# Altium PCB PCB1.PcbDoc (part 2 of 2)
Units mm, origin at the board's own origin, x right, y up, seen from the top; angles counter-clockwise.
Board outline 71.07 x 44.83 mm, 4 copper layers (Top Layer, Layer 1, Layer 2, Bottom Layer), stack 0.584 mm thick; 134 components, 68 nets, 384 pads, 224 vias.
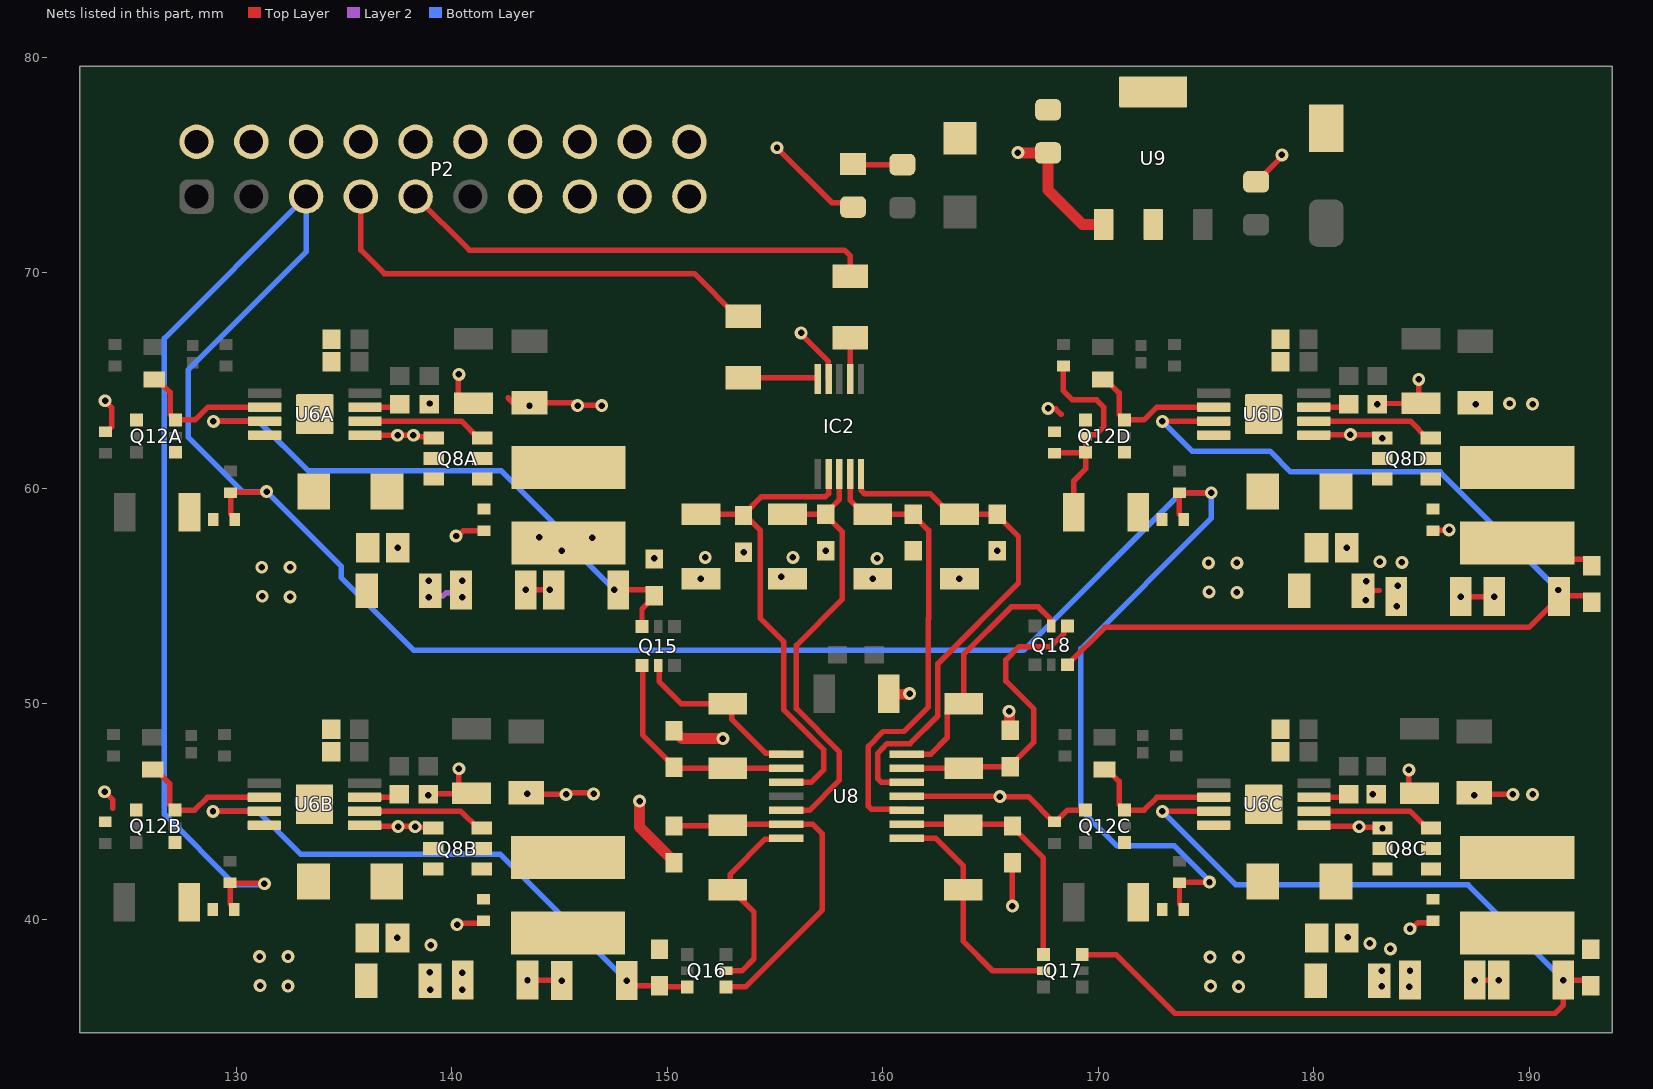
[diagram p4: the nets of this part, all layers, seen from the top]

## Via types
v1: diameter 0.6, hole 0.3, Top Layer to Bottom Layer, 128 vias
v2: diameter 0.6, hole 0.3, Top Layer to Bottom Layer, tented both sides, 94 vias
v3: diameter 0.6/0.6/0.6 (per signal layer), hole 0.3, Top Layer to Bottom Layer, 2 vias

## Nets (pads, with @x,y where several pads share a name; then routed paths per layer and width w, separated by ;. In a path a pad name is that pad's centre, name@x,y a point inside that pad or via, vN(x,y) a via of type N, cw(c..) or ccw(c..) an arc to the next point about the centre after c; other vN are vias at no path point) (continued)
B_SS_BJTD: C66D.1 Q12D.5 Q12D.6 R48D.2 R54D.2 | length 10.5
  Top Layer w0.254: R54D.2@167.97,61.623 167.993,61.647 169.383,61.647 Q12D.6@169.407,61.67 ; R48D.2@168.376,65.673 168.376,64.516 168.794,64.099 169.915,64.099 170.248,63.766 170.248,62.852 169.889,62.493 169.48,62.493 Q12D.5@169.407,62.42 Q12D.6@169.407,61.67 ; C66D.1@168.857,58.889 168.857,60.344 169.407,60.893 Q12D.6@169.407,61.67
En: P2.5 R49A.1 R49B.1 R49C.1 R49D.1 R50A.2 R50B.2 R50C.2 R50D.2 | length 141.8
  Top Layer w0.254: R50B.2@129.92,40.463 129.92,40.513 129.725,40.709 R49B.1@129.725,41.699 129.746,41.677 131.297,41.677 v1(131.318,41.656) ; R50A.2@129.939,58.559 129.939,58.609 129.743,58.804 R49A.1@129.743,59.794 129.767,59.818 131.396,59.818 v1(131.42,59.842) ; R50D.2@173.956,58.559 173.956,58.609 173.761,58.804 R49D.1@173.761,59.794 R49D.1@173.761,59.794 175.233,59.793 v1(175.235,59.792) ; R50C.2@173.958,40.463 173.958,40.513 173.763,40.709 R49C.1@173.763,41.699 173.792,41.728 v1(175.154,41.728)
  Bottom Layer w0.254: v1(131.318,41.656) 131.267,41.605 129.946,41.605 126.67,44.882 126.67,66.954 P2.5@133.248,73.533 133.248,70.968 127.787,65.507 127.787,62.357 130.302,59.842 v1(131.42,59.842) 134.869,56.393 134.869,55.86 138.252,52.476 166.522,52.476 173.838,59.792 v1(175.235,59.792) 175.235,58.598 169.189,52.553 169.189,45.081 170.856,43.414 173.527,43.414 175.154,41.787 v1(175.154,41.728)
FB_in1: C65A.2 Q15.6 R37A.1 U6A.3 | length 28.3
  Top Layer w0.254: v1(128.949,63.105) 129.178,63.105 129.186,63.112 U6A.3@131.33,63.112 ; C65A.2@147.55,55.537 v1(147.55,55.283) C65A.2@147.728,55.283 149.137,55.283 R37A.1@149.403,55.017 149.403,54.967 148.831,54.394 Q15.6@148.831,53.58
  Bottom Layer w0.254: v1(128.949,63.105) 131.053,63.105 133.35,60.808 142.308,60.808 146.27,56.846 146.27,56.563 v1(147.55,55.283)
FB_in2: C65B.2 Q16.6 R37B.1 U6B.3 | length 27.8
  Top Layer w0.254: v1(128.93,45.009) 129.159,45.009 129.167,45.017 U6B.3@131.311,45.017 ; v1(148.116,37.161) 148.356,36.921 R37B.1@149.638,36.921 149.692,36.867 Q16.6@150.93,36.867
  Bottom Layer w0.254: v1(128.93,45.009) 131.013,45.009 132.994,43.028 142.249,43.028 v1(148.116,37.161)
FB_in3: C65C.2 Q17.6 R37C.1 U6C.3 | length 50.4
  Top Layer w0.254: Q17.6@169.251,38.367 170.827,38.367 173.558,35.636 191.184,35.636 191.57,36.022 191.57,36.921 v1(191.57,37.187) 192.572,37.187 R37C.1@192.838,36.921 ; v1(172.969,45.009) 173.197,45.009 173.205,45.017 U6C.3@175.349,45.017
  Bottom Layer w0.254: v1(172.969,45.009) 176.372,41.605 187.151,41.605 v1(191.57,37.187)
FB_in4: C65D.2 Q18.6 R37D.1 U6D.3 | length 49.6
  Top Layer w0.254: Q18.6@168.568,51.815 170.296,53.543 189.974,53.543 191.448,55.017 192.836,55.017 R37D.1@192.849,55.004 ; v1(172.967,63.105) 173.195,63.105 173.203,63.112 U6D.3@175.348,63.112
  Bottom Layer w0.254: v1(172.967,63.105) 174.349,61.722 177.952,61.722 178.918,60.757 185.856,60.757 v1(191.331,55.281)
GND: C57A.1 C57B.1 C57C.1 C57D.1 C58A.1 C58B.1 C58C.1 C58D.1 C59A.1 C59B.1 C59C.1 C59D.1 C60A.2 C60B.2 C60C.2 C60D.2 C61A.1 C61B.1 C61C.1 C61D.1 C62A.2 C62B.2 C62C.2 C62D.2 C66A.2 C66B.2 C66C.2 C66D.2 C67.2 C69.2 C71.2 C73.2 C75.2 C76.2 C77.2 D5A.1 D5B.1 D5C.1 D5D.1 IC2.4 LED_2.2 P2.2 P2.4 P2.6 P2.8 P2.10 P2.12 P2.14 P2.16 P2.18 P2.20 Q12A.1 Q12A.4 Q12B.1 Q12B.4 Q12C.1 Q12C.4 Q12D.1 Q12D.4 R50A.1 R50B.1 R50C.1 R50D.1 R54A.1 R54B.1 R54C.1 R54D.1 R56.2 R57.1 R58.2 R59.1 R60.2 R64.1 R65.2 R66.1 U6A.4 U6A.9 U6B.4 U6B.9 U6C.4 U6C.9 U6D.4 U6D.9 U8.11 U9.1 | length 45.6
  Top Layer w0.254: v1(123.901,45.923) 124.282,45.542 124.282,45.161 ; v1(123.927,64.059) 123.927,64.042 124.231,63.737 124.231,62.852 124.003,62.623 R54A.1@123.952,62.623 ; v1(138.913,45.771) 138.963,45.822 140.266,45.822 140.335,45.891 v1(140.335,46.99) ; C58A.1@138.964,63.904 138.964,63.907 v1(138.989,63.932) ; C60A.2@140.31,63.943 140.31,65.253 v1(140.335,65.278) ; v1(155.092,75.794) 157.642,73.244 158.42,73.244 LED_2.2@158.623,73.041 ; v1(156.21,67.208) 156.21,67.155 157.465,65.9 157.465,65.088 IC2.4@157.488,65.065 ; U8.11@161.112,45.71 165.415,45.71 v1(165.43,45.695) 166.754,45.695 167.922,44.527 R54C.1@167.972,44.527 168.022,44.527 168.568,45.074 Q12C.4@169.408,45.074 ; v1(166.014,40.615) R64.1@166.014,42.635 ; v1(167.665,63.703) 167.691,63.678 168.021,63.678 168.275,63.424 ; C76.2@177.317,74.219 177.351,74.219 178.511,75.379 v1(178.511,75.463) ; v1(182.931,63.906) C58D.1@182.93,63.904 182.959,63.932 184.317,63.932 184.327,63.943 184.488,63.943 184.861,64.316 v1(184.861,65.049) ; C60C.2@184.329,45.847 184.404,45.922 v1(184.404,46.939)
  Top Layer w0.508: v1(148.717,45.491) 148.717,44.285 150.317,42.685 R59.1@150.317,42.635 ; R57.1@150.317,48.754 150.317,48.704 150.463,48.558 150.513,48.558 150.685,48.387 v1(152.578,48.387) ; C67.2@160.275,50.47 160.301,50.444 161.087,50.444 161.112,50.47 v1(161.239,50.47) ; v1(165.862,49.657) 165.88,49.639 165.88,48.813 R66.1@165.913,48.78 ; v1(166.268,75.565) 166.273,75.56 167.661,75.56 C77.2@167.665,75.556 167.665,75.336 167.665,73.838 169.267,72.236 U9.1@170.242,72.236
  other v1: 176.505,36.881 132.41,36.906 175.209,36.906 131.115,36.932 175.184,38.252 176.505,38.252 131.089,38.278 132.41,38.278 182.729,45.808 132.512,54.966 131.216,54.991 176.428,55.169 175.133,55.194 151.562,55.802 159.537,55.802 163.551,55.802 155.296,55.905 175.108,56.54 176.428,56.54 159.741,56.744 151.765,56.794 155.829,56.794 153.543,57.037 157.353,57.1 165.303,57.1
  other v3: 131.191,56.337 132.512,56.337
IN-1: C68.2 Q15.1 R57.2 U8.2 | length 10.6
  Top Layer w0.254: Q15.1@148.831,51.78 148.863,51.747 148.863,48.559 150.317,47.104 R57.2@150.317,47.054 150.362,47.01 U8.2@155.512,47.01
IN-2: C70.2 Q16.1 R59.2 U8.6 | length 16.6
  Top Layer w0.254: R59.2@150.317,44.335 150.331,44.348 C70.2@152.806,44.348 ; Q16.1@152.73,36.867 153.631,36.867 157.201,40.437 157.201,43.971 156.762,44.41 U8.6@155.512,44.41 152.841,44.41 C70.2@152.806,44.375
IN-3: C72.2 Q17.1 R64.2 U8.9 | length 11.5
  Top Layer w0.254: U8.9@161.112,44.41 165.94,44.41 R64.2@166.014,44.335 166.014,44.285 167.451,42.848 Q17.1@167.451,38.367
IN-4: C74.2 Q18.1 R66.2 U8.13 | length 14.4
  Top Layer w0.254: U8.13@161.112,47.01 C74.2@163.749,47.01 ; C74.2@163.754,47.08 R66.2@165.913,47.08 165.913,47.13 167.005,48.222 167.005,49.759 165.71,51.054 165.71,52.045 166.319,52.654 167.788,52.654 168.395,53.261 168.395,53.442 Q18.1@168.568,53.615
ISENA: Q8A.4 R31A.2 U6A.5 | length 7.9
  Top Layer w0.254: U6A.5@135.98,62.462 135.982,62.46 137.488,62.46 v1(137.49,62.459) v1(138.227,62.459) 138.292,62.394 139.094,62.394 Q8A.4@139.159,62.329 ; 142.621,64.195 142.849,63.967 R31A.2@143.612,63.967 ; v1(143.612,63.83) R31A.2@143.612,63.967 ; v1@146.964,63.856 145.847,63.856 145.736,63.967 R31A.2@143.612,63.967
  other v1: 145.847,63.83 146.964,63.83
ISENB: Q8B.4 R31B.2 U6B.5 | length 6.5
  Top Layer w0.254: U6B.5@135.961,44.367 135.996,44.332 138.268,44.332 138.335,44.265 139.108,44.265 Q8B.4@139.141,44.233 Q8B.4@139.16,44.252 ; R31B.2@143.466,45.871 143.541,45.796 v1(145.313,45.796) 145.39,45.872 146.558,45.872 v1@146.583,45.898 ; v1(143.51,45.822) R31B.2@143.51,45.827
  other v1: 137.514,44.307 138.303,44.298 146.583,45.822
ISENC: Q8C.4 R31C.2 U6C.5 | length 5.1
  Top Layer w0.254: U6C.5@179.999,44.367 180.034,44.332 182.058,44.332 182.125,44.265 183.146,44.265 v1(183.179,44.233) ; v1(187.427,45.771) 187.428,45.772 R31C.2@187.428,45.871 ; R31C.2@187.452,45.847 187.503,45.796 v1(189.23,45.796)
  other v1: 182.093,44.298 190.144,45.796
ISEND: Q8D.4 R31D.2 U6D.5 | length 3.3
  Top Layer w0.254: U6D.5@179.998,62.462 180.008,62.473 181.675,62.473 v1(181.686,62.484) 183.022,62.484 v1(183.177,62.329)
  other v1: 187.503,63.906 190.144,63.906 189.078,63.932
NetIC2_2: IC2.2 R68.1 | length 1.6
  Top Layer w0.254: IC2.2@158.488,65.065 158.488,66.667 R68.1@158.496,66.675
NetIC2_5: IC2.5 R69.1 | length 3.5
  Top Layer w0.254: R69.1@153.518,65.123 156.965,65.123 156.988,65.1 IC2.5@156.988,65.065
NetLED_2_1: LED_2.1 R67.2 | length 2.3
  Top Layer w0.254: LED_2.1@158.623,75.041 158.648,75.016 R67.2@160.909,75.016
OpOut1: C68.1 Q15.2 U8.1 | length 8.4
  Top Layer w0.254: Q15.2@149.581,51.78 149.619,51.741 149.619,51.041 150.647,50.013 152.805,50.013 C68.1@152.806,50.014 153.004,49.817 153.004,49.282 154.578,47.708 155.464,47.708 U8.1@155.512,47.66
OpOut2: C70.1 Q16.2 U8.7 | length 9.3
  Top Layer w0.254: Q16.2@152.73,37.617 153.467,37.617 154.026,38.176 154.026,40.342 152.992,41.375 C70.1@152.928,41.375 ; C70.1@152.806,41.375 152.928,41.496 152.928,42.107 154.543,43.723 155.475,43.723 U8.7@155.512,43.76
OpOut3: C72.1 Q17.2 U8.8 | length 10.9
  Top Layer w0.254: U8.8@161.112,43.76 162.463,43.76 163.728,42.494 C72.1@163.728,41.375 163.728,38.989 165.1,37.617 Q17.2@167.451,37.617
OpOut4: C74.1 Q18.2 U8.14 | length 12.1
  Top Layer w0.254: U8.14@161.112,47.66 162.214,47.66 162.981,48.427 162.981,49.641 163.354,50.014 C74.1@163.754,50.014 163.754,52.299 165.958,54.503 167.21,54.503 167.745,53.969 167.745,53.688 Q18.2@167.818,53.615
PGateA: Q8A.3 U6A.6 | length 5.8
  Top Layer w0.254: U6A.6@135.98,63.112 140.451,63.112 141.234,62.329 Q8A.3@141.409,62.329
PGateB: Q8B.3 U6B.6 | length 5.8
  Top Layer w0.254: U6B.6@135.961,45.017 140.432,45.017 141.216,44.233 Q8B.3@141.391,44.233
PGateC: Q8C.3 U6C.6 | length 5.8
  Top Layer w0.254: U6C.6@179.999,45.017 184.47,45.017 185.254,44.233 Q8C.3@185.429,44.233
PGateD: Q8D.3 U6D.6 | length 5.8
  Top Layer w0.254: U6D.6@179.998,63.112 184.468,63.112 185.252,62.329 Q8D.3@185.427,62.329
pre_+3.3: C77.1 D7.1 FU2.1 U9.2 U9.4
RTA: Q12A.3 R44A.1 U6A.2 | length 6.7
  Top Layer w0.254: R44A.1@126.213,65.048 126.338,65.048 126.941,64.445 126.941,63.418 Q12A.3@127.189,63.17 128.098,63.17 128.69,63.762 U6A.2@131.33,63.762
RTB: Q12B.3 R44B.1 U6B.2 | length 6.8
  Top Layer w0.254: R44B.1@126.143,46.952 126.268,46.952 126.663,46.557 126.918,46.303 126.918,46.12 126.922,46.116 126.922,45.322 Q12B.3@127.17,45.074 128.079,45.074 128.671,45.667 U6B.2@131.311,45.667
RTC: Q12C.3 R44C.1 U6C.2 | length 6.7
  Top Layer w0.254: R44C.1@170.283,46.952 170.408,46.952 170.96,46.4 170.96,45.322 Q12C.3@171.208,45.074 172.117,45.074 172.71,45.667 U6C.2@175.349,45.667
RTD: Q12D.3 R44D.1 U6D.2 | length 6.8
  Top Layer w0.254: R44D.1@170.205,65.048 170.33,65.048 170.959,64.42 170.959,63.418 Q12D.3@171.207,63.17 172.115,63.17 172.708,63.762 U6D.2@175.348,63.762
SCL: P2.9 R68.2 | length 22.2
  Top Layer w0.254: P2.9@138.328,73.533 140.818,71.044 158.217,71.044 158.496,70.764 R68.2@158.496,69.83
SDA: P2.7 R69.2 | length 21.5
  Top Layer w0.254: P2.7@135.788,73.533 135.788,71.044 136.881,69.952 151.264,69.952 153.243,67.973 R69.2@153.518,67.973
SMos3A: D5A.2 L5A.1 Q8A.1 Q8A.2 Q8A.5 Q8A.6 R35A.2
SMos3B: D5B.2 L5B.1 Q8B.1 Q8B.2 Q8B.5 Q8B.6 R35B.2
SMos3C: D5C.2 L5C.1 Q8C.1 Q8C.2 Q8C.5 Q8C.6 R35C.2
SMos3D: D5D.2 L5D.1 Q8D.1 Q8D.2 Q8D.5 Q8D.6 R35D.2
StarN3A: C56A.2 C65A.1 R35A.1 | length 2.5
  Top Layer w0.254: v1(140.208,57.785) 140.302,57.785 140.549,58.033 R35A.1@141.497,58.033 ; v1(143.435,55.283) v1(144.55,55.283)
StarN3B: C56B.2 C65B.1 R35B.1 | length 2.9
  Top Layer w0.254: v1(140.259,39.759) 140.325,39.825 141.366,39.825 R35B.1@141.478,39.937 ; v1(143.518,37.187) 145.09,37.187 v1(145.116,37.161)
StarN3C: C56C.2 C65C.1 R35C.1 | length 2.3
  Top Layer w0.254: v1(184.455,39.568) 184.548,39.568 184.835,39.855 185.435,39.855 R35C.1@185.516,39.937 ; v1(187.455,37.187) v1(188.57,37.187)
StarN3D: C56D.2 C65D.1 R35D.1 | length 2.3
  Top Layer w0.254: R35D.1@185.514,58.033 185.532,58.05 186.254,58.05 v1(186.271,58.067) ; v1(186.818,54.978) v1(188.365,54.978)
Vadj_1: C69.1 IC2.7 R56.1 U8.3 | length 22.6
  Top Layer w0.254: C69.1@151.562,58.802 153.617,58.802 R56.1@153.619,58.8 ; U8.3@155.512,46.36 156.672,46.36 157.251,46.939 157.251,47.879 155.397,49.733 155.397,52.883 154.305,53.975 154.305,58.064 154.026,58.344 153.619,58.75 R56.1@153.619,58.8 ; IC2.7@157.488,60.665 157.488,59.756 157.339,59.607 154.376,59.607 153.619,58.85 R56.1@153.619,58.8
Vadj_2: C71.1 IC2.8 R58.1 U8.5 | length 21.3
  Top Layer w0.254: U8.5@155.512,45.06 156.591,45.06 157.988,46.457 157.988,47.774 155.988,49.774 155.988,52.716 158.115,54.843 158.115,57.988 157.353,58.75 R58.1@157.353,58.8 ; C71.1@155.575,58.802 157.351,58.802 R58.1@157.353,58.8 ; IC2.8@157.988,60.665 157.988,59.485 157.353,58.85 R58.1@157.353,58.8
Vadj_3: C73.1 IC2.9 R60.1 U8.10 | length 21.8
  Top Layer w0.254: IC2.9@158.488,60.665 158.488,59.452 159.137,58.802 C73.1@159.537,58.802 161.415,58.802 161.415,58.752 162.122,58.045 162.122,53.949 162.117,53.945 162.117,49.849 160.985,48.717 160.02,48.717 159.334,48.031 159.334,45.256 159.483,45.108 161.064,45.108 U8.10@161.112,45.06
Vadj_4: C75.1 IC2.10 R65.1 U8.12 | length 25
  Top Layer w0.254: IC2.10@158.988,60.665 159.011,60.642 159.011,59.89 159.16,59.741 162.212,59.741 163.151,58.802 C75.1@163.551,58.802 165.301,58.802 165.301,58.752 166.294,57.759 166.294,55.601 162.549,51.856 162.549,49.443 161.265,48.158 160.205,48.158 159.976,47.929 159.766,47.719 159.766,46.525 159.931,46.36 U8.12@161.112,46.36
VCC3A: C55A.1 U6A.7 | length 1.7
  Top Layer w0.254: U6A.7@135.98,63.762 137.451,63.762 C55A.1@137.592,63.904
VCC3B: C55B.1 U6B.7 | length 1.7
  Top Layer w0.254: U6B.7@135.961,45.667 137.432,45.667 C55B.1@137.573,45.808
VCC3C: C55C.1 U6C.7 | length 1.7
  Top Layer w0.254: U6C.7@179.999,45.667 181.47,45.667 C55C.1@181.611,45.808
VCC3D: C55D.1 U6D.7 | length 1.7
  Top Layer w0.254: U6D.7@179.998,63.762 181.468,63.762 C55D.1@181.61,63.904
Vout1: C56A.1 C61A.2 C62A.1 L5A.2 P2.13 R37A.2 | length 3.5
  Top Layer w0.254: v1(138.938,54.94) 139.016,55.018 C62A.1@139.016,55.257 ; v1(144.069,57.734) 145.151,57.734 L5A.2@145.415,57.47
  Layer 2 w0.254: v1(138.938,54.94) 139.004,55.006 139.609,55.006 139.746,55.143 140.191,55.143 140.394,54.94 v1(140.487,54.94)
  other v1: 138.938,55.702 140.487,55.702 149.403,56.744 145.11,57.099 137.505,57.238 146.533,57.709
Vout2: C56B.1 C61B.2 C62B.1 L5B.2 P2.15 R37B.2 | length 0.4
  Top Layer w0.254: C62B.1@138.997,37.161 138.997,36.745 v1(139.014,36.728)
  other v1: 140.487,36.728 140.487,37.516 138.989,37.541 139.04,38.811 137.486,39.143
Vout3: C56C.1 C61C.2 C62C.1 L5C.2 P2.19 R37C.2 | length 0.3
  Top Layer w0.254: C62C.1@183.036,37.161 183.036,37.005 v1(183.134,36.905)
  other v1: 184.429,36.881 183.134,37.617 184.455,37.617 183.54,38.633 182.596,38.886 181.559,39.167
Vout4: C56D.1 C61D.2 C62D.1 L5D.2 P2.17 R37D.2 | length 5.1
  Top Layer w0.254: v1(182.397,54.813) 182.272,54.939 C62D.1@182.272,55.257 182.39,55.139 182.67,55.139 182.788,55.257 183.034,55.257 ; L5D.2@189.433,57.47 190.186,56.717 R37D.2@192.836,56.717
  other v1: 183.845,54.534 183.896,55.474 182.423,55.677 184.074,56.566 183.058,56.591 181.522,57.238
pads on no net: P2.11 Q15.3 Q15.4 Q15.5 Q16.3 Q16.4 Q16.5 Q17.3 Q17.4 Q17.5 Q18.3 Q18.4 Q18.5

## Polygon pours and split planes (outlines as drawn)
GND on Layer 2 "GND_L03_P005" (solid, remove dead copper, pour order 5): 192.938,78.791 193.243,78.486 193.243,35.839 cw(c192.811,35.839) 192.811,35.408 123.571,35.408 cw(c123.622,35.458) 123.571,35.509 123.571,35.611 123.571,78.816
+42 on Layer 2 "+42_L03_P004" (solid, remove dead copper, pour order 4): 124.739,37.44 127.127,35.052 153.619,35.052 166.853,48.285 187.808,48.285 188.062,48.539 188.062,51.587 187.427,52.222 173.177,52.222 172.136,53.264 172.136,65.049 173.126,66.04 184.683,66.04 184.912,66.269 184.912,68.478 183.871,69.52 164.998,69.52 162.255,66.777 162.255,49.352 151.892,38.989 127.813,38.989 127.127,39.675 127.127,47.136 cw(c129.269,45.991) 128.021,48.075 128.117,48.133 147.117,48.133 147.599,48.616 147.599,50.902 146.558,51.943 127.838,51.943 cw(c127.838,52.629) 127.152,52.629 127.152,65.634 127.686,66.167 140.995,66.167 141.605,66.777 141.605,68.732 141.097,69.24 133.071,69.24 131.597,70.714 131.597,74.219 131.318,74.498 130.099,74.498 129.87,74.27 129.87,70.993 128.245,69.367 125.12,69.367 124.358,68.605 124.358,66.827 124.739,66.446
Vout1 on Layer 2 "VOUT1_L03_P003" (solid, remove dead copper, pour order 3): 136.881,55.626 ccw(c138.176,55.626) 138.176,54.331 140.36,54.331 ccw(c140.36,54.991) 141.021,54.991 141.021,56.032 cw(c141.478,56.032) 141.478,56.49 149.022,56.49 ccw(c149.022,56.693) 149.225,56.693 149.225,63.5 144.348,68.377 144.348,73.99 143.739,74.6 143.002,74.6 142.443,74.041 142.443,67.843 147.472,62.814 147.472,59.588 cw(c147.206,59.55) 147.168,59.284 138.405,59.284 ccw(c138.405,57.76) 136.881,57.76
Vout2 on Layer 2 "VOUT2_L03_P002" (solid, remove dead copper, pour order 2): 138.43,36.246 140.36,36.246 140.919,36.805 140.919,38.024 141.224,38.329 149.809,38.329 151.359,39.878 151.359,64.516 146.99,68.885 146.99,74.016 146.406,74.6 145.517,74.6 144.907,73.99 144.907,68.478 149.758,63.627 149.758,41.326 149.428,40.996 138.024,40.996 136.881,39.853 136.881,37.795
Vout4 on Layer 2 "VOUT4_L03_P001" (solid, remove dead copper, pour order 1): 180.188,54.737 181.229,53.696 188.189,53.696 189.611,55.118 189.611,66.98 185.039,71.552 149.758,71.552 149.555,71.755 149.555,74.168 149.123,74.6 147.93,74.6 147.422,74.092 147.422,71.653 149.377,69.698 184.328,69.698 188.036,65.989 188.036,58.064 187.223,57.252 183.566,57.252 182.778,58.039 181.051,58.039 180.188,57.175
Vout3 on Layer 2 "VOUT3_L03_P000" (solid, remove dead copper, pour order 0): 181,37.795 181,39.853 181.966,40.818 189.332,40.818 190.525,42.012 190.525,67.615 185.674,72.466 150.495,72.466 149.962,73 149.962,73.965 150.597,74.6 185.928,74.6 192.481,68.047 192.481,39.421 191.618,38.557 186.436,38.557 185.572,37.694 185.572,37.008 184.861,36.297 182.499,36.297
GND on Layer 1 (split plane): 193.317,35.258 123.269,35.258 123.269,79.068 193.317,79.068

## Keep-outs
Keep-Out Layer:
  the board outline again, w0.254

## Other copper
Top Layer:
  rectangle net ISEND: 186.639,63.271 190.627,64.567
  rectangle net ISENC: 186.588,45.136 190.678,46.431
  rectangle net ISENA: 142.393,63.195 147.599,64.516
  rectangle net ISENB: 142.646,45.187 147.041,46.482
  rectangle net StarN3C: 186.944,36.297 189.052,38.075
  region net +42: 124.169,67.705 125.358,68.894 cw(c126.517,68.178) 126.203,69.504 146.456,69.504 cw(c145.889,68.025) 147.472,68.072 147.472,67.081 cw(c146.645,67.081) 146.645,66.254 139.592,66.254 ccw(c139.592,66.134) 139.471,66.134 139.471,64.795 cw(c139.395,64.795) 139.395,64.719 136.863,64.719 ccw(c136.863,64.603) 136.747,64.603 136.747,64.171 135.269,64.171 cw(c135.269,64.243) 135.198,64.243 135.198,67.423 ccw(c135.01,67.387) 135.045,67.575 132.117,67.575 ccw(c132.117,67.287) 131.913,67.49 130.964,66.542 cw(c130.515,66.991) 130.515,66.356 126.986,66.356 126.808,66.178 125.622,66.178 125.444,66.356 124.17,66.356 cw(c124.17,66.523) 124.003,66.523 124.003,67.304 cw(c124.569,67.304)
  region net +42: 164.414,69.774 186.36,69.774 cw(c186.423,67.882) 188.316,67.945 188.316,66.269 183.617,66.269 183.388,66.04 183.388,64.77 180.924,64.77 180.772,64.618 180.772,64.186 179.222,64.186 179.222,67.437 179.07,67.589 176.022,67.589 174.803,66.37 170.942,66.37 170.739,66.167 169.672,66.167 169.418,66.421 164.541,66.421 cw(c164.541,67.386) 163.576,67.386 163.576,68.936 cw(c164.414,68.936)
  region net GND: 153.949,57.48 153.949,56.591 152.654,55.296 150.647,55.296 150.647,56.312 151.816,57.48 153.162,57.48
  region net Vout4: 181.077,57.912 182.58,57.912 cw(c182.58,57.432) 182.919,57.771 183.349,57.341 ccw(c183.75,57.742) 183.75,57.175 186.055,57.175 186.792,57.912 186.792,58.547 191.851,58.547 cw(c191.851,58.19) 192.103,58.442 193.092,57.454 cw(c192.543,56.905) 193.319,56.905 193.319,56.032 cw(c193.192,56.032) 193.192,55.905 192.741,55.905 cw(c192.741,56.472) 192.341,56.071 192.07,56.342 ccw(c191.774,56.046) 191.774,56.464 185.064,56.464 ccw(c185.064,55.702) 184.302,55.702 184.302,54.153 cw(c184.226,54.153) 184.226,54.077 181.839,54.077 cw(c181.839,54.178) 181.737,54.178 181.737,56.388 ccw(c181.559,56.388) 181.559,56.566 181.051,56.566 cw(c181.051,56.642) 180.975,56.642 180.975,57.81 cw(c181.077,57.81)
  region net +42: 124.194,49.061 126.831,51.698 cw(c127.546,50.983) 127.546,51.994 147.193,51.994 cw(c147.193,51.765) 147.422,51.765 147.422,48.438 cw(c147.142,48.438) 147.142,48.158 139.573,48.158 ccw(c139.573,47.955) 139.37,47.955 139.37,46.685 137.084,46.685 136.906,46.685 ccw(c136.906,46.507) 136.728,46.507 136.728,46.177 cw(c136.627,46.177) 136.627,46.076 135.306,46.076 cw(c135.306,46.203) 135.179,46.203 135.179,49.327 ccw(c135.026,49.327) 135.026,49.479 132.397,49.479 ccw(c132.397,48.469) 131.682,49.183 131.055,48.556 cw(c130.341,49.271) 130.34,48.26 127.139,48.26 ccw(c127.139,47.862) 126.858,48.144 cw(c126.71,48.291) 126.71,48.082 125.938,48.082 cw(c125.938,49.113) 125.423,48.22 ccw(c124.99,47.469) 124.99,48.336 124.104,48.336 cw(c124.104,48.463) 123.977,48.463 123.977,48.538 cw(c124.718,48.538)
  region net +42: 168.314,49.188 171.142,52.016 cw(c171.395,51.764) 171.395,52.121 177.038,52.121 185.843,52.121 cw(c185.844,50.228) 186.805,51.859 187.935,51.192 cw(c187.622,50.661) 188.239,50.66 188.239,48.26 cw(c188.138,48.26) 188.138,48.158 183.617,48.158 ccw(c183.616,47.879) 183.337,47.879 183.337,46.736 cw(c183.286,46.736) 183.286,46.685 182.206,46.685 180.95,46.685 ccw(c180.95,46.507) 180.772,46.507 180.772,46.177 cw(c180.67,46.177) 180.67,46.076 179.299,46.076 cw(c179.299,46.152) 179.222,46.152 179.222,49.327 ccw(c179.07,49.327) 179.07,49.479 176.318,49.479 ccw(c176.318,48.765) 175.813,49.27 174.907,48.365 cw(c174.655,48.617) 174.655,48.26 171.13,48.26 ccw(c171.13,48.051) 170.982,48.199 170.953,48.169 cw(c170.743,48.378) 170.743,48.082 169.82,48.082 cw(c169.82,48.501) 169.524,48.205 169.393,48.336 168.148,48.336 168.148,48.787 cw(c168.715,48.787)
  region net pre_+3.3: 162.814,75.489 165.143,75.489 ccw(c165.143,75.652) 165.306,75.636 cw(c166.865,75.489) 166.865,77.056 168.153,77.056 cw(c168.153,75.148) 169.502,76.497 171.753,74.246 cw(c170.952,73.445) 172.085,73.444 172.085,71.501 172.999,71.501 172.999,73.409 cw(c174.281,73.409) 173.375,74.315 175.336,76.276 181.356,76.276 181.356,78.41 ccw(c181.204,78.41) 181.204,78.562 174.987,78.562 cw(c174.987,79.19) 174.543,78.746 174.326,78.962 ccw(c173.882,78.518) 173.882,79.146 165.351,79.146 ccw(c165.351,77.804) 164.402,78.753 163.005,77.357 ccw(c163.467,76.895) 162.814,76.895
  region net GND: 126.892,61.911 126.892,60.158 127.349,59.701 127.349,56.826 129.808,54.367 136.569,54.367 136.645,54.443 136.645,57.963 135.418,57.963 134.867,59.041 134.867,59.472 134.867,67.361 133.985,67.361 133.851,67.227 133.851,64.298 132.785,64.298 132.785,63.003 132.41,62.687 130.549,62.687 130.549,62.114 130.549,62.089 132.251,62.089 132.556,61.784 132.556,59.041 131.108,57.593 129.178,57.593 129.178,60.209 127.476,61.911
  region net Vout2: 136.931,39.814 138.735,39.814 139.268,39.281 142.215,39.281 142.748,39.814 142.748,40.348 149.403,40.348 150.038,39.713 150.038,38.163 149.174,38.163 148.971,38.367 141.021,38.367 141.021,36.258 138.506,36.258 138.481,36.233 138.481,38.011 138.024,38.468 136.931,38.468
  region net Vout1: 136.95,57.923 138.754,57.923 139.49,57.186 142.03,57.186 142.767,57.923 142.767,58.456 148.554,58.456 149.809,57.201 149.809,56.272 148.731,56.272 148.528,56.475 141.04,56.475 140.945,56.38 140.945,54.367 138.525,54.367 138.5,54.342 138.5,56.12 138.042,56.577 136.95,56.577
  region net StarN3A: 142.951,56.185 145.237,56.185 145.237,54.381 142.977,54.381 142.951,54.407
  region net GND: 163.906,57.582 162.636,56.312 162.636,55.321 164.44,55.321 165.735,56.617 165.735,57.582
  region net GND: 159.918,57.556 158.648,56.286 158.648,55.296 160.452,55.296 161.747,56.591 161.747,57.556
  region net GND: 155.931,57.556 154.661,56.286 154.661,55.296 156.464,55.296 157.759,56.591 157.759,57.556
  region net GND: 167.665,62.89 168.25,63.475 169.723,63.475 169.723,62.916 169.672,62.865 168.758,62.865 168.275,62.382 167.665,62.382
  region net +3.3: 164.338,73.584 160.109,73.584 160.109,71.946 160.096,71.933 164.338,71.933
  region net +5: 174.371,72.974 174.371,71.501 179.4,71.501 179.781,71.12 181.381,71.12 181.381,73.304 181.153,73.533 179.934,73.533 179.4,73
  region net GND: 170.891,61.976 170.891,60.223 171.348,59.766 171.348,57.963 174.879,54.432 180.569,54.432 180.645,54.508 180.645,57.912 179.476,57.912 178.867,59.106 178.867,59.538 178.867,67.361 178.003,67.361 177.851,67.208 177.851,64.364 176.784,64.364 176.784,63.068 176.332,62.687 174.549,62.687 174.549,62.179 174.549,62.154 176.251,62.154 176.555,61.849 176.555,59.106 175.108,57.658 173.177,57.658 173.177,60.274 171.475,61.976
  region net GND: 182.276,46.239 182.429,46.366 185.776,46.366 185.776,45.35 182.276,45.35
  region net GND: 182.429,64.451 185.852,64.451 185.852,63.435 182.429,63.435
  region net SMos3D: 180.264,60.706 180.264,59.004 181.788,59.004 182.905,60.122 183.896,60.122 185.242,58.776 185.801,58.776 186.995,59.969 192.1,59.969 192.1,61.976 186.309,61.976 186.004,61.697 185.979,61.697 182.702,61.697 181.712,60.706 180.289,60.706
  region net GND: 170.891,43.891 170.891,42.139 171.348,41.681 171.348,39.878 174.879,36.347 180.569,36.347 180.645,36.424 180.645,39.827 179.476,39.827 178.867,41.021 178.867,41.453 178.867,49.276 178.003,49.276 177.851,49.124 177.851,46.279 176.784,46.279 176.784,44.983 176.332,44.602 174.549,44.602 174.549,44.094 174.549,44.069 176.251,44.069 176.555,43.764 176.555,41.021 175.108,39.573 173.177,39.573 173.177,42.189 171.475,43.891
  region net SMos3C: 180.264,42.596 180.264,40.919 181.788,40.919 182.905,42.037 183.871,42.037 185.217,40.691 185.826,40.691 187.02,41.885 192.1,41.885 192.1,43.866 186.309,43.866 186.004,43.586 185.979,43.586 182.702,43.586 181.712,42.596 180.289,42.596
  region net Vout3: 180.975,39.827 182.778,39.827 183.515,39.091 186.055,39.091 186.792,39.827 186.792,40.361 192.1,40.361 193.243,39.218 193.243,38.176 192.303,38.176 192.1,38.379 185.064,38.379 184.963,38.278 184.963,36.271 182.55,36.271 182.499,36.271 182.499,38.049 182.093,38.456 180.975,38.456
  region net GND: 138.354,46.334 138.379,46.355 141.834,46.355 141.834,45.339 138.354,45.339
  region net SMos3B: 136.22,42.596 136.22,40.919 137.744,40.919 137.744,41.123 138.659,42.037 139.827,42.037 141.173,40.691 141.783,40.691 142.977,41.885 148.057,41.885 148.057,43.866 142.265,43.866 141.961,43.586 141.935,43.586 138.659,43.586 137.668,42.596 136.246,42.596
  region net SMos3B: 141.173,40.691 141.173,42.037 141.783,42.037 141.783,40.691
  region net StarN3B: 142.723,38.075 145.618,38.075 145.618,36.271 142.748,36.271 142.723,36.297
  region net GND: 126.873,43.891 126.873,42.139 127.33,41.681 127.33,39.878 130.861,36.347 136.55,36.347 136.627,36.424 136.627,39.827 135.458,39.827 134.849,41.021 134.849,41.453 134.849,49.276 133.985,49.276 133.833,49.124 133.833,46.279 132.766,46.279 132.766,44.983 132.313,44.602 130.531,44.602 130.531,44.094 130.505,44.069 132.232,44.069 132.537,43.764 132.537,41.021 131.089,39.573 129.159,39.573 129.159,42.189 127.457,43.891
  region net GND: 123.622,44.78 124.206,45.364 125.679,45.364 125.679,44.806 125.654,44.78 124.739,44.78 124.231,44.272 123.622,44.272
  region net GND: 138.411,64.451 141.91,64.451 141.91,63.435 138.411,63.435
  region net SMos3A: 136.239,60.706 136.239,58.939 137.763,58.939 137.763,59.142 138.677,60.057 139.846,60.057 141.192,58.71 141.802,58.71 142.995,59.904 148.075,59.904 148.075,61.976 142.383,61.976 142.051,61.671 138.743,61.671 137.778,60.706
  region net GND: 123.641,62.8 124.316,63.475 125.698,63.475 125.698,62.825 125.673,62.8 124.758,62.8 124.25,62.292 123.641,62.292
Bottom Layer:
  region net StarN3A: 139.395,58.369 142.342,58.369 145.237,56.159 145.237,54.381 142.875,54.381 139.395,57.531
  region net StarN3B: 139.776,40.259 143.408,40.259 145.618,38.049 145.618,36.271 142.723,36.271 139.776,39.218
  region net StarN3C: 183.947,40.284 186.868,40.284 189.078,38.075 189.078,36.297 186.464,36.297 183.947,39.013
  region net StarN3D: 185.191,58.369 186.639,58.369 188.798,56.21 188.798,54.102 186.334,54.102 185.191,55.245
  region net ISENB: 137.135,44.958 139.217,44.958 139.624,44.958 140.005,44.958 141.529,46.482 143.205,46.482 147.015,46.482 147.015,45.187 141.859,45.187 140.665,43.993 137.135,43.993
  region net ISENC: 181.229,44.907 183.312,44.907 183.718,44.907 184.099,44.907 185.623,46.431 187.3,46.431 190.678,46.431 190.678,45.136 185.953,45.136 184.76,43.942 181.229,43.942
  region net +5: 174.352,73.063 174.352,71.501 179.381,71.501 179.762,71.12 181.381,71.12 181.381,73.304 181.153,73.533 179.914,73.533 179.47,73.089
  region net ISEND: 181.102,63.043 183.185,63.043 183.591,63.043 183.972,63.043 185.496,64.567 187.173,64.567 190.627,64.567 190.627,63.271 185.826,63.271 184.556,62.001 181.102,62.001
  region net ISENA: 137.077,62.978 139.16,62.978 139.566,62.978 139.947,62.978 141.471,64.502 143.148,64.502 145.009,64.502 145.009,63.206 141.802,63.206 140.608,62.012 137.077,62.012